# EAGLE board mega_lcd_driver (EAGLE 9.2.0)
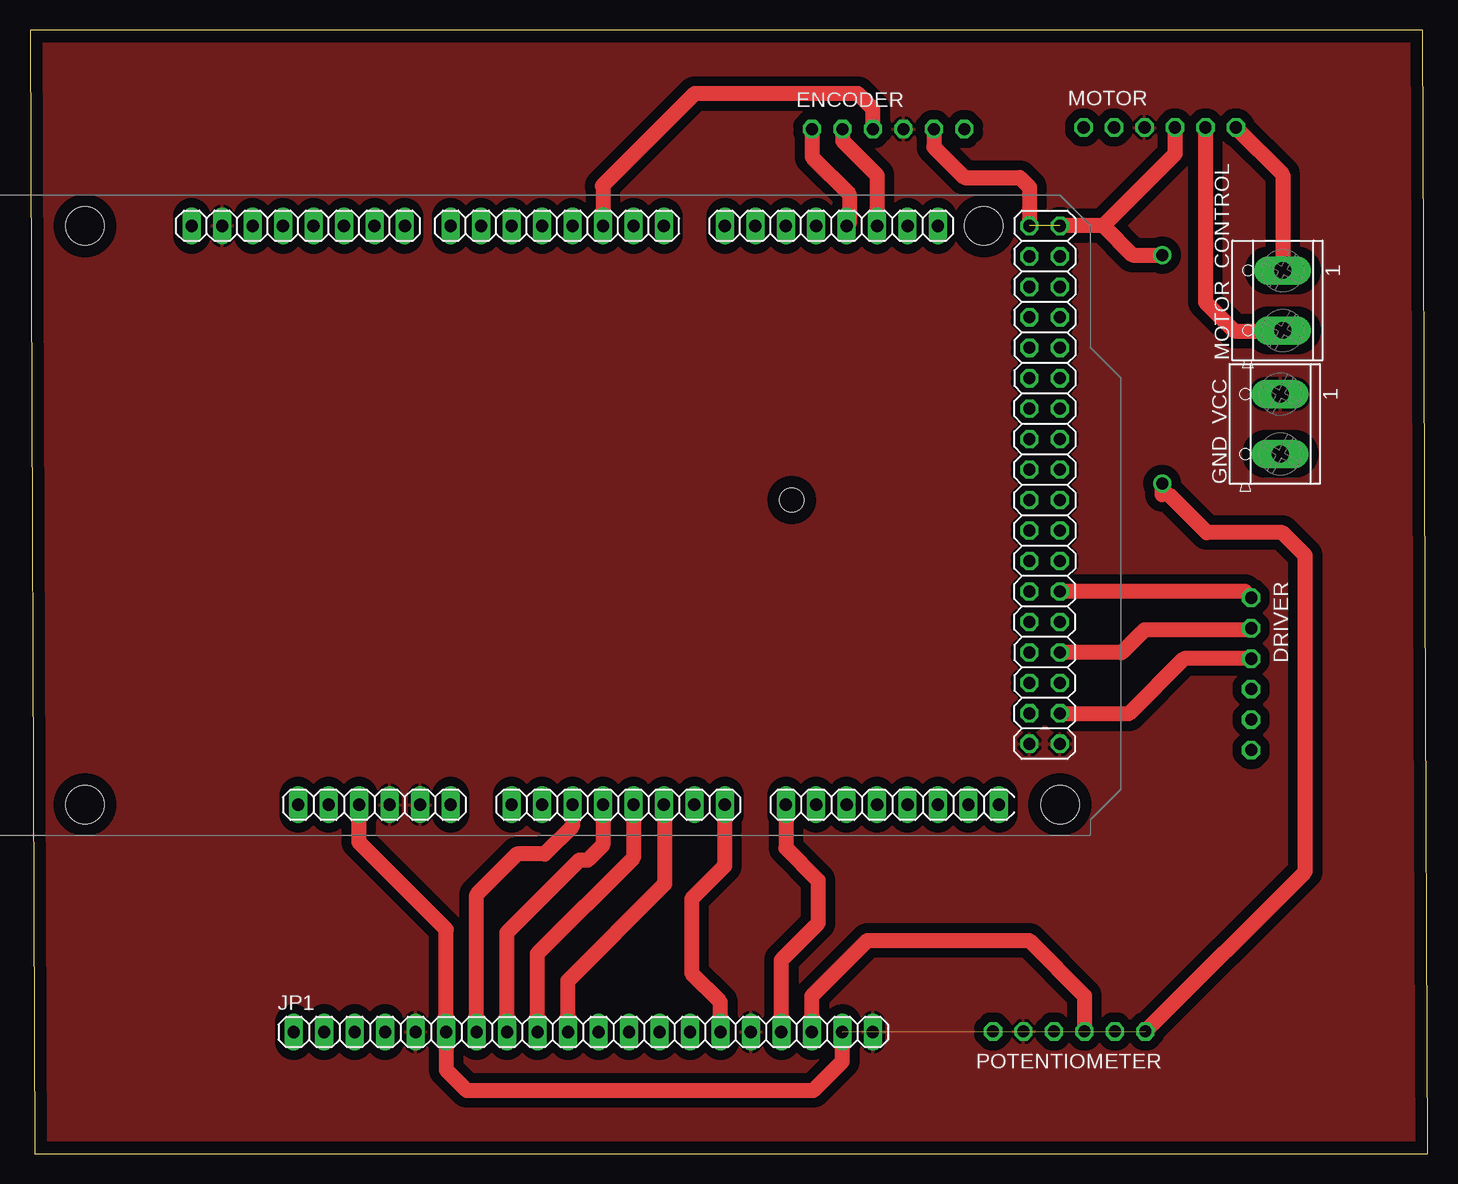
[diagram p0: board, top side]
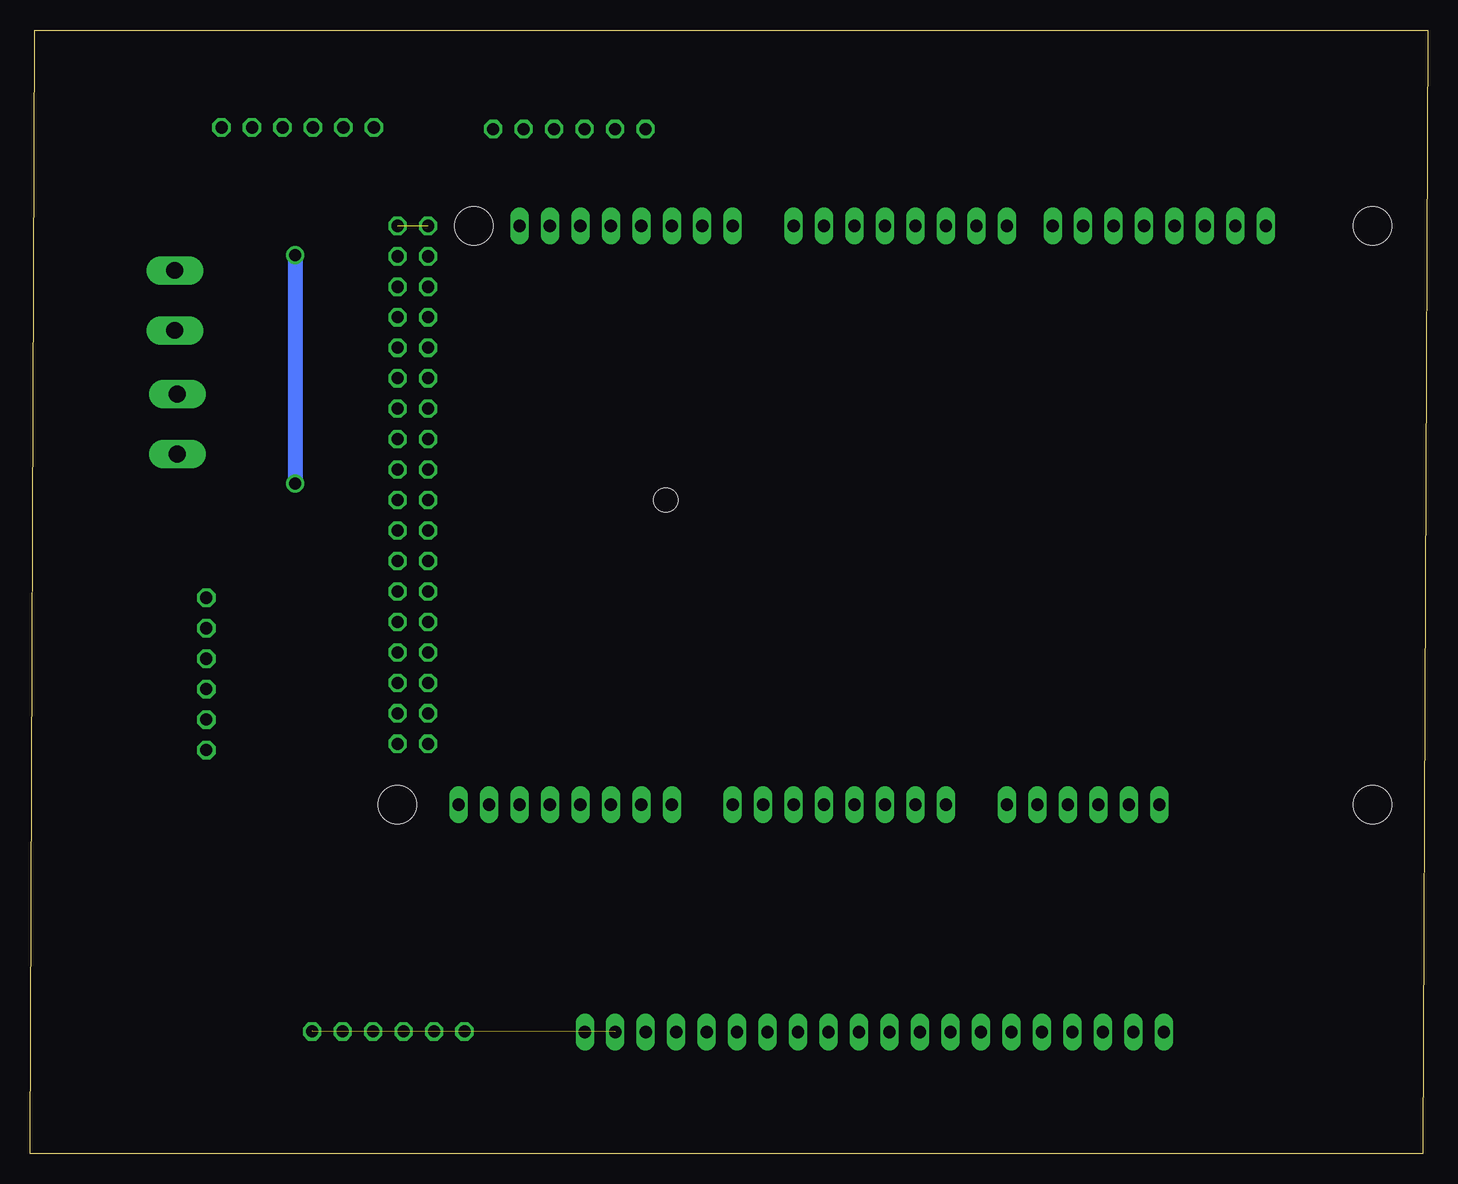
[diagram p1: board, bottom side, seen from below]

Size 116.5 x 93.7 mm. Coordinates in mm from the lower left corner, seen from the top.
Outline: 0.4,0 116.5,0 116.1,93.7 0,93.7 0.4,0
Copper layers (1*16): Top 0.035mm / dielectric 1.5mm / Bottom 0.035mm
Design rules "default *": minimum track width 6mil, minimum drill 0.35mm, track to track 0.8mm, track to pad 0.8mm, pad to pad 0.8mm, via to via 0.8mm, smd to smd 6mil, copper to edge 40mil, drill to drill 6mil, minimum pad ring 10mil, minimum via ring 8mil, stop-mask expansion 4mil, vias tented up to drill 0mil, thermal gap 10mil

## Footprints (pad centres in the part's own frame; a part is rotated, then mirrored left to right if it is on the bottom)
1X06-CLEAN = drill 1.016 octagon: 1 -6.35,0; 2 -3.81,0; 3 -1.27,0; 4 1.27,0; 5 3.81,0; 6 6.35,0
TERMINAL_BLOCK_2P_5 = drill 1.4 pad 2.38 long: 1 2.5,-0.45; 2 -2.5,-0.45
MEGA_ARDUINO = drill 1.016 long: 1 33.02,2.54; 2 35.56,2.54; 3 38.1,2.54; 4 40.64,2.54; 5 43.18,2.54; 6 45.72,2.54; 7 50.8,2.54; 8 53.34,2.54; 9 55.88,2.54; 10 58.42,2.54; 11 60.96,2.54; 12 63.5,2.54; 13 66.04,2.54; 14 68.58,2.54; 15 73.66,2.54; 16 76.2,2.54; 17 78.74,2.54; 18 81.28,2.54; 19 83.82,2.54; 20 86.36,2.54; 21 88.9,2.54; 22 91.44,2.54; 23 86.36,50.8; 24 83.82,50.8; 25 81.28,50.8; 26 78.74,50.8; 27 76.2,50.8; 28 73.66,50.8; 29 71.12,50.8; 30 68.58,50.8; 31 63.5,50.8; 32 60.96,50.8; 33 58.42,50.8; 34 55.88,50.8; 35 53.34,50.8; 36 50.8,50.8; 37 48.26,50.8; 38 45.72,50.8; 39 41.91,50.8; 40 39.37,50.8; 41 36.83,50.8; 42 34.29,50.8; 43 31.75,50.8; 44 29.21,50.8; 45 26.67,50.8; 46 24.13,50.8 | drill 1.016 octagon: 47 93.98,50.8; 48 96.52,50.8; 49 93.98,48.26; 50 96.52,48.26; 51 93.98,45.72; 52 96.52,45.72; 53 93.98,43.18; 54 96.52,43.18; 55 93.98,40.64; 56 96.52,40.64; 57 93.98,38.1; 58 96.52,38.1; 59 93.98,35.56; 60 96.52,35.56; 61 93.98,33.02; 62 96.52,33.02; 63 93.98,30.48; 64 96.52,30.48; 65 93.98,27.94; 66 96.52,27.94; 67 93.98,25.4; 68 96.52,25.4; 69 93.98,22.86; 70 96.52,22.86; 71 93.98,20.32; 72 96.52,20.32; 73 93.98,17.78; 74 96.52,17.78; 75 93.98,15.24; 76 96.52,15.24; 77 93.98,12.7; 78 96.52,12.7; 79 93.98,10.16; 80 96.52,10.16; 81 93.98,7.62; 82 96.52,7.62 | hole 3.2: 15.24,50.8; 15.24,2.54; 90.17,50.8; 96.52,2.54 | hole 2: 74.168,27.94
1X20 = drill 1.016 long: 1 -24.13,0; 2 -21.59,0; 3 -19.05,0; 4 -16.51,0; 5 -13.97,0; 6 -11.43,0; 7 -8.89,0; 8 -6.35,0; 9 -3.81,0; 10 -1.27,0; 11 1.27,0; 12 3.81,0; 13 6.35,0; 14 8.89,0; 15 11.43,0; 16 13.97,0; 17 16.51,0; 18 19.05,0; 19 21.59,0; 20 24.13,0

## Placement (x,y rotation side)
DRIVER  [1X06-CLEAN]  101.8,40.02 270 top
ENCODER  [1X06-CLEAN]  71.54,85.44 0 top
GND_VCC  CON_TERMINAL_BLOCK_02-5MM  [TERMINAL_BLOCK_2P_5]  103.77,60.85 90 top
IC1  [MEGA_ARDUINO]  -10.66,26.57 0 top
JP1  [1X20]  46.12,10.16 0 top
MOTOR  [1X06-CLEAN]  94.18,85.57 0 top
MOTOR_CONTROL  CON_TERMINAL_BLOCK_02-5MM  [TERMINAL_BLOCK_2P_5]  103.98,71.15 90 top
POTENTIOMETER  [1X06-CLEAN]  86.63,10.21 180 top

## Library data of the parts
DRIVER ENCODER JP1 MOTOR POTENTIOMETER = adafruit
GND_VCC MOTOR_CONTROL = dp_devices.v6
IC1 = arduino

## Nets
+3V3: IC1.2
+5V: ENCODER.5 IC1.3 IC1.47 IC1.48 JP1.6 JP1.19 MOTOR.4 POTENTIOMETER.1
+VIN: IC1.6
GND: ENCODER.4 GND_VCC.1 IC1.4 IC1.5 IC1.45 IC1.81 IC1.82 JP1.5 JP1.16 JP1.20 MOTOR.3 POTENTIOMETER.5
N$1: ENCODER.1 IC1.26
N$2: ENCODER.2 IC1.25
N$4: MOTOR.5 MOTOR_CONTROL.2
N$5: MOTOR.6 MOTOR_CONTROL.1
N$6: DRIVER.3 IC1.80
N$7: DRIVER.2 IC1.76
N$8: DRIVER.1 IC1.72
N$10: JP1.18 POTENTIOMETER.3
N$11: IC1.15 JP1.17
N$13: IC1.11 JP1.9
N$15: IC1.7
N$16: ENCODER.3 IC1.33
N$17: IC1.14 JP1.15
N$18: IC1.9 JP1.7
N$21: IC1.12 JP1.10
N$23: IC1.10 JP1.8

## Tracks (layer width: path | path; a pad name or v marks a point on that pad's centre or on a via)
+5V  (via drill 1 pad 1.3)  (2 unrouted)
  Top 1.27: IC1.3 27.4,29.07 27.4,26 34.69,18.71 JP1.6 34.69,7.01 36.4,5.3 65.3,5.3 67.71,7.71 JP1.19 | ENCODER.5 75.35,83.95 77.9,81.4 82.5,81.4 83.32,80.58 IC1.47 | MOTOR.4 95.45,83.35 89.47,77.37 | 89.47,77.37 IC1.48 | POTENTIOMETER.1 106.3,23.53 106.3,49.9 104.4,51.8 98.1,51.8 94.94,54.97 94.38,54.97 v94.38,55.88 | 89.47,77.37 91.91,74.93 v94.38,74.93
  Bottom 1.27: v94.38,74.93 v94.38,55.88
GND
  pour Top (isolate 0.8): 0.4,100.33 0.4,0 116.22,0 116.22,100.33
N$1
  Top 1.27: ENCODER.1 65.19,83.11 68.3,80 68.3,77.59 IC1.26
N$2
  Top 1.27: ENCODER.2 67.73,84.47 70.62,81.58 IC1.25
N$4
  Top 1.27: MOTOR.5 97.99,71.01 100.4,68.6 104.38,68.6 MOTOR_CONTROL.2
N$5
  Top 1.27: MOTOR.6 104.43,81.67 MOTOR_CONTROL.1
N$6
  Top 1.27: DRIVER.3 96.19,41.29 91.6,36.7 85.89,36.7 IC1.80
N$7
  Top 1.27: DRIVER.2 101.67,43.7 92.9,43.7 91,41.8 IC1.76
N$8
  Top 1.27: DRIVER.1 101.28,46.89 IC1.72
N$10
  Top 1.27: JP1.18 65.17,13.17 69.8,17.8 83.3,17.8 87.9,13.2 POTENTIOMETER.3
N$11
  Top 1.27: IC1.15 63,25.51 65.7,22.81 65.7,19.23 62.63,16.16 JP1.17
N$13
  Top 1.27: JP1.9 42.31,16.71 50.3,24.7 IC1.11
N$16
  Top 1.27: ENCODER.3 70.27,87.13 69,88.4 55.4,88.4 47.7,80.7 47.76,80.64 IC1.33
N$17
  Top 1.27: JP1.15 57.55,12.66 55.15,15.06 55.15,21.25 57.9,24 57.9,29.09 IC1.14
N$18
  Top 1.27: JP1.7 37.23,21.63 40.6,25 42.9,25 45.22,27.32 IC1.9
N$21
  Top 1.27: JP1.10 44.85,14.45 52.9,22.5 52.9,29.05 IC1.12
N$23
  Top 1.27: JP1.8 39.77,18.47 45.8,24.5 46.5,24.5 47.76,25.76 IC1.10